# Altium PCB ICSL Receiver gede Ver2.PcbDoc
Units mm, origin at the board's own origin, x right, y up, seen from the top; angles counter-clockwise.
Board outline 152.4 x 101.6 mm, 2 copper layers (Top Layer, Bottom Layer); 19 components, 42 nets, 186 pads, 28 vias.
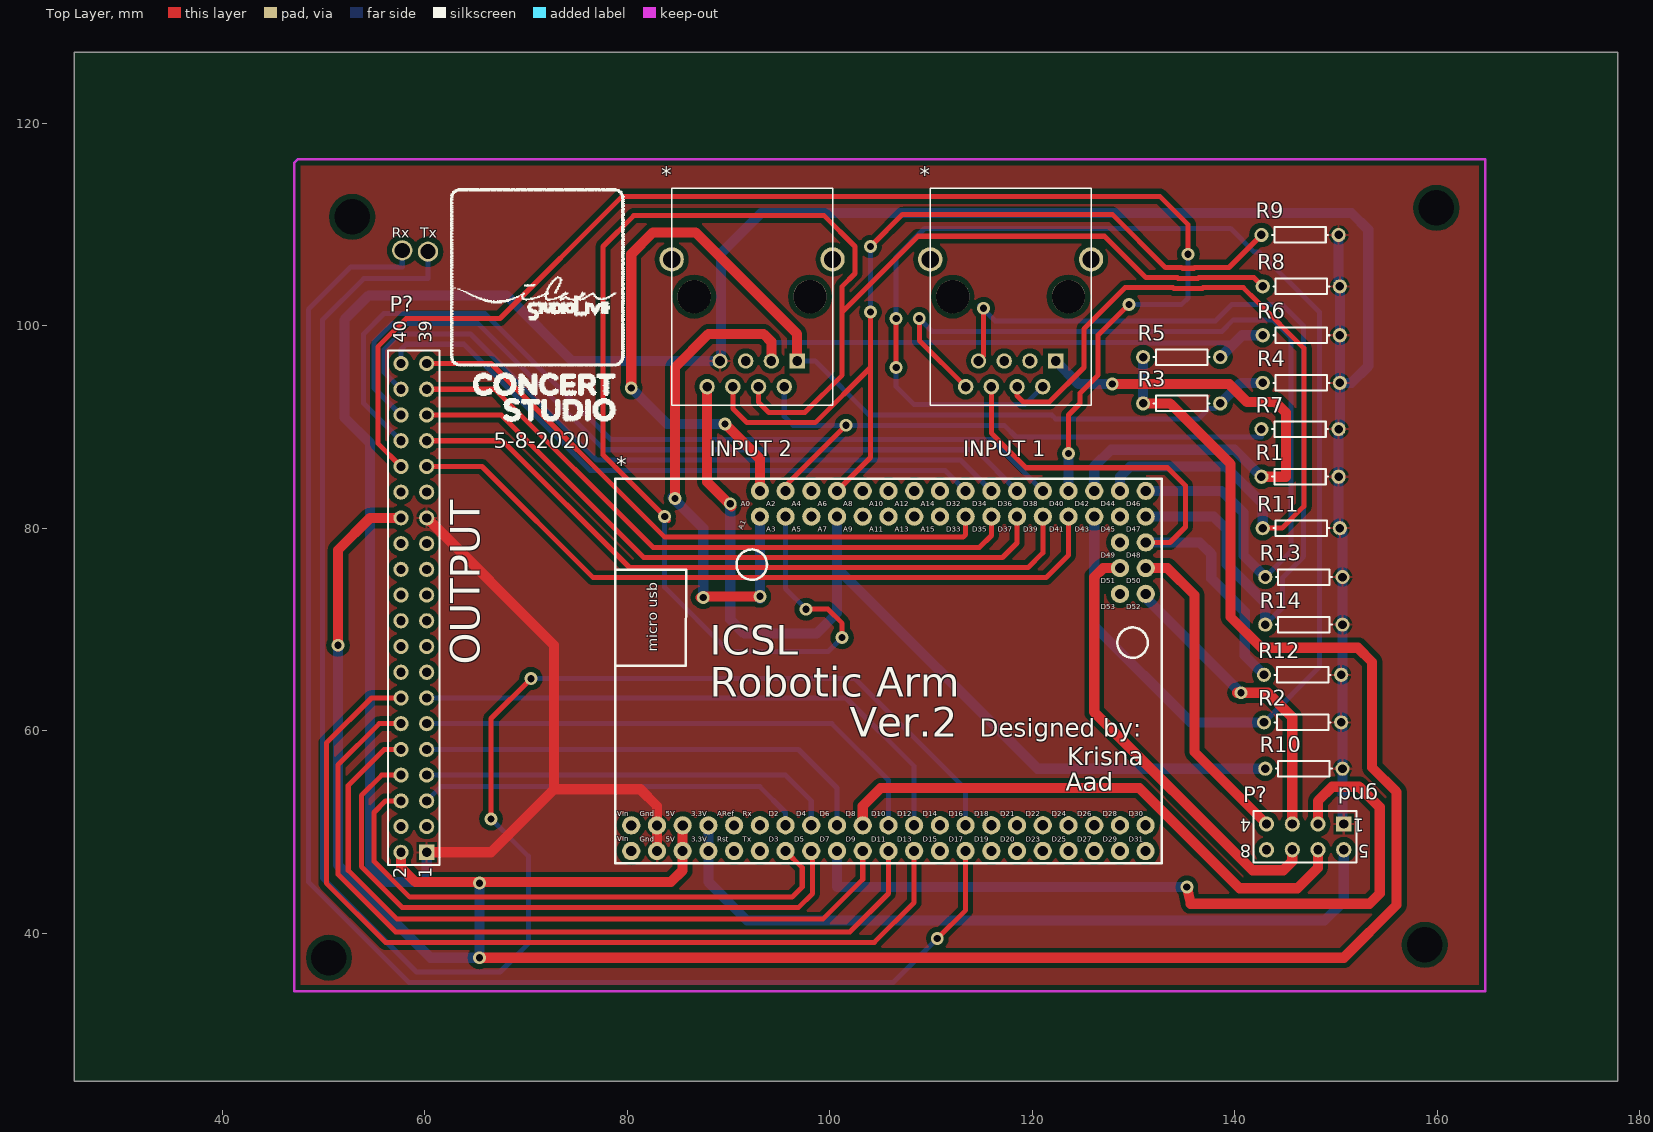
[diagram p0: Top Layer view]
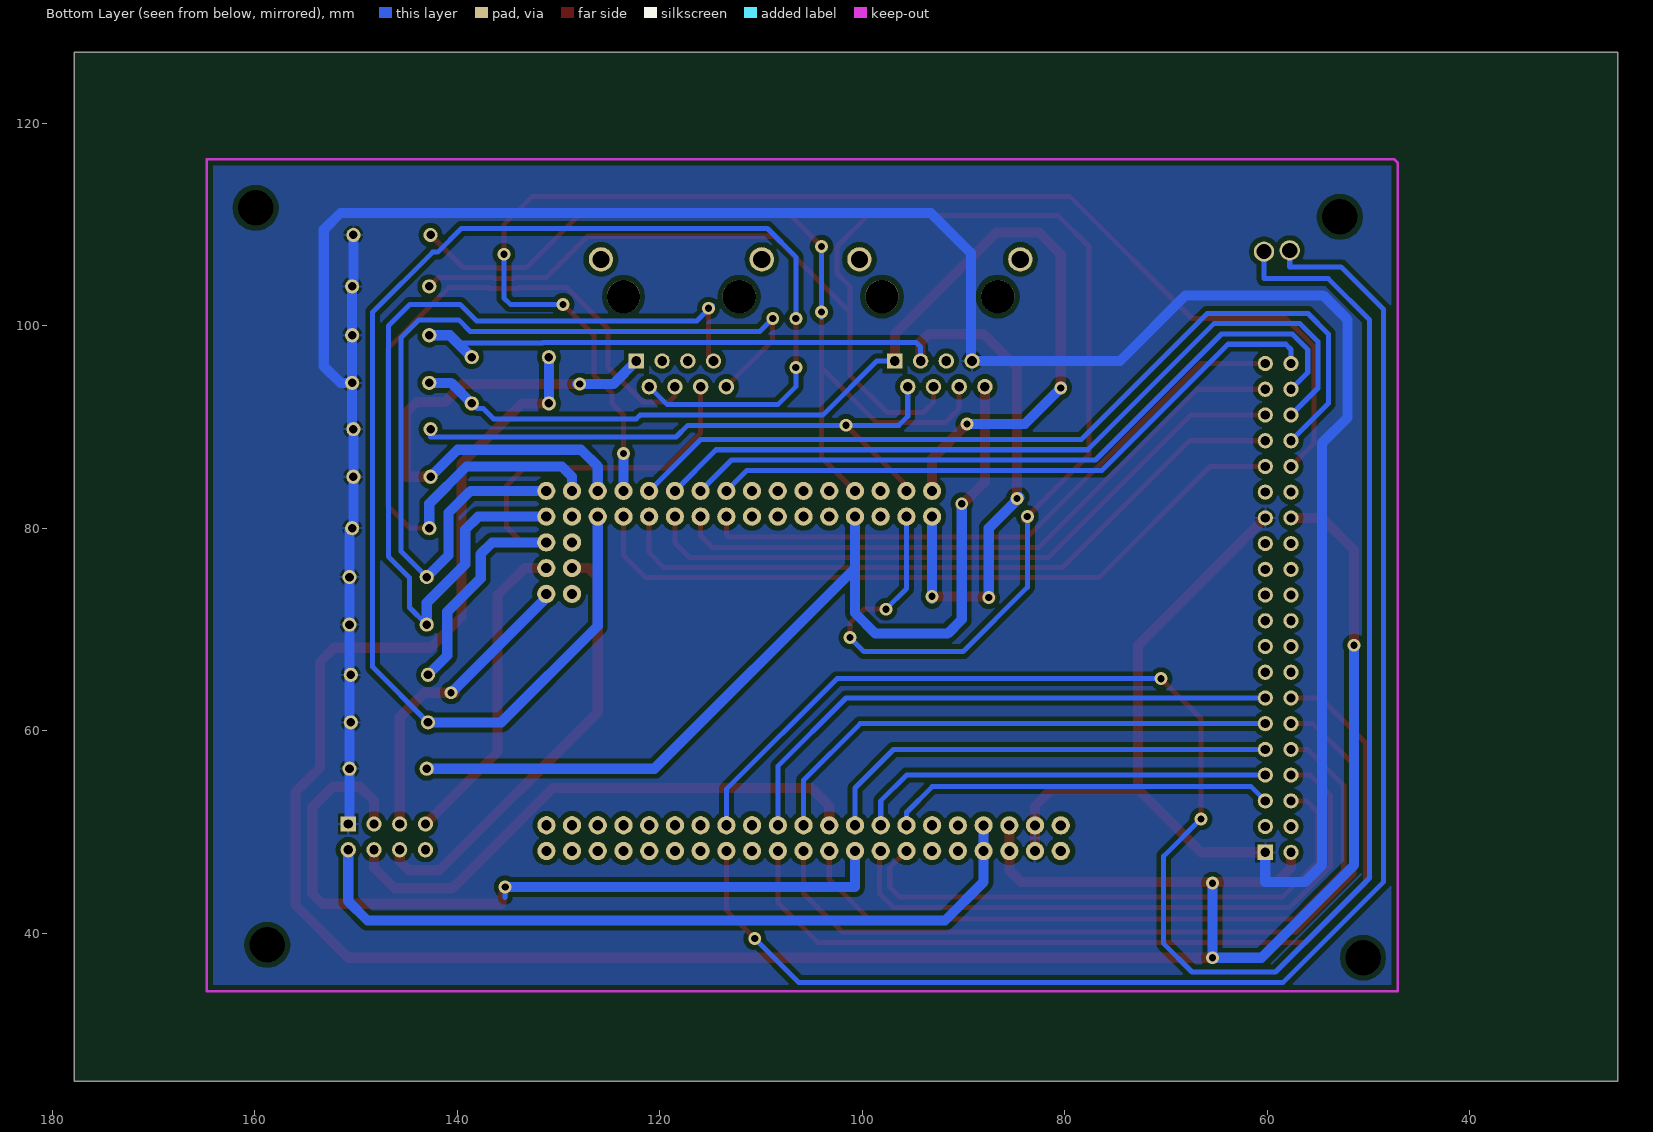
[diagram p1: Bottom Layer view, seen from below]

## Layer stack, top to bottom
Top Solder: solder mask 0.0102, Solder Resist, Dk 3.5
Top Layer: signal copper 0.0356
Dielectric 1: dielectric 0.32, FR-4, Dk 4.8
Bottom Layer: signal copper 0.0356
Bottom Solder: solder mask 0.0102, Solder Resist, Dk 3.5

## Board outline
25.4,25.4 177.8,25.4 177.8,127 25.4,127

## Design rules (kind name [scope] priority, off if disabled: settings)
Clearance [All] p1: gap=0.5
PolygonConnect [All] p1: connectstyle=Relief reliefconductorwidth=0.254 reliefentries=4 polygonreliefangle="90 Angle" airgapwidth=0.254
RoutingVias [All] p1: holewidth=0.711 width=1.27 viastyle="Through Hole" minholewidth=0.711 minwidth=1.27 maxholewidth=0.711 maxwidth=1.27
SolderMaskExpansion [All] p1: expansion=0.102
UnpouredPolygon [All] p1: allowunpoured=FALSE
Width [All] p1: maxlimit=1 minlimit=0.1 preferedwidth=0.5
29 further rules are at their usual default settings.

## Classes and differential pairs
component class "ICSL Receiver gede Ver2": * P? R1 R2 R3 R4 R5 R6 R7 R8 R9 R10 R11 R12 R13 R14

## Components (designator, comment, footprint, x,y, rotation, side; value= is the part's Value field where it differs from the comment)
* "Input2" PCBComponent_1#1 96.774,96.52 r180 top
* "Input1" PCBComponent_1#1 122.301,96.52 r180 top
* "MegaPro" PCBComponent_1#2 80.396,50.668 r0 top
P? "Header 20X2" HDR2X20 60.198,48.006 r90 top
P? "NRF24L01" HDR2X4_CEN 150.749,50.8 r180 top
R1 "Res1" AXIAL-0.3 146.431,85.09 r0 top
R2 "Res2" AXIAL-0.3 146.685,60.833 r180 top
R3 "Res1" AXIAL-0.3 134.747,92.329 r0 top
R4 "Res1" AXIAL-0.3 146.558,94.361 r0 top
R5 "Res1" AXIAL-0.3 134.747,96.901 r180 top
R6 "Res1" AXIAL-0.3 146.558,99.06 r180 top
R7 "Res1" AXIAL-0.3 146.431,89.789 r180 top
R8 "Res1" AXIAL-0.3 146.558,103.886 r180 top
R9 "Res1" AXIAL-0.3 146.431,108.966 r180 top
R10 "Res1" AXIAL-0.3 146.812,56.261 r180 top
R11 "Res1" AXIAL-0.3 146.558,80.01 r180 top
R12 "10k" AXIAL-0.3 146.685,65.532 r180 top
R13 "Res1" AXIAL-0.3 146.812,75.184 r180 top
R14 "Res1" AXIAL-0.3 146.812,70.485 r0 top

## Footprints (in the part's own frame and the unit in brackets; to place one, negate y for a bottom-side part, rotate by r counter-clockwise, add the part's x,y. Pads: shape width x height; smd on the part's side, far side on the other; paste and mask are expansions set on the pad)
AXIAL-0.3 [mm] "Axial Device, Thru-Hole; 2 Leads; 0.3 in Pin Spacing"
  round 1.4 hole 0.85: 1(-3.81,0) 2(3.81,0)
  silkscreen extent -2.77,-0.76 2.77,0.76
HDR2X4_CEN [mm] "Connector; Header; 4x2 Position"
  rect 1.5x1.5 hole 0.9: 1(0,0)
  round 1.5 hole 0.9: 2(2.54,0) 3(5.08,0) 4(7.62,0) 5(0,2.54) 6(2.54,2.54) 7(5.08,2.54) 8(7.62,2.54)
  silkscreen extent -1.27,-1.27 8.89,3.81
HDR2X20 [mm] "Connector; Header; 20x2 Position"
  rect 1.5x1.5 hole 0.9: 1(0,0)
  round 1.5 hole 0.9: 2(0,2.54) 3(2.54,0) 4(2.54,2.54) 5(5.08,0) 6(5.08,2.54) 7(7.62,0) 8(7.62,2.54) 9(10.16,0) 10(10.16,2.54) 11(12.7,0) 12(12.7,2.54) 13(15.24,0) 14(15.24,2.54) 15(17.78,0) 16(17.78,2.54) 17(20.32,0) 18(20.32,2.54) 19(22.86,0) 20(22.86,2.54) 21(25.4,0) 22(25.4,2.54) 23(27.94,0) 24(27.94,2.54) 25(30.48,0) 26(30.48,2.54) 27(33.02,0) 28(33.02,2.54) 29(35.56,0) 30(35.56,2.54) 31(38.1,0) 32(38.1,2.54) 33(40.64,0) 34(40.64,2.54) 35(43.18,0) 36(43.18,2.54) 37(45.72,0) 38(45.72,2.54) 39(48.26,0) 40(48.26,2.54)
  silkscreen extent -1.27,-1.27 49.53,3.81
PCBComponent_1#1 [mil]
  round 94.49 hole 66.93: 0(-137.6,-394.88) 0(487.6,-394.88)
  rect 60x60 hole 37.4: 1(0,0)
  round 60 hole 37.4: 2(50,100) 3(100,0) 4(150,100) 5(200,0) 6(250,100) 7(300,0) 8(350,100)
  round 129.92 hole 129.92 unplated: ""(-50,-250) ""(400,-250)
  silkscreen extent -138,-671 488,171
PCBComponent_1#2 [mil]
  round 70.87 hole 39.37: 1(0,0) 2(0,-100) 3(100,0) 4(100,-100) 5(200,0) 6(199.8,-99.8) 7(300,0) 8(299.8,-99.8) 9(400,0) 10(400,-100) 11(499.8,0.2) 12(499.8,-99.8) 13(599.8,0.2) 14(599.8,-99.8) 15(699.8,0.2) 16(699.8,-99.8) 17(799.8,0.2) 18(799.8,-99.8) 19(900,0) 20(899.8,-99.8) 21(999.8,0.2) 22(999.8,-99.8) 23(1099.8,0.2) 24(1099.8,-99.8) 25(1199.8,0.2) 26(1199.8,-99.8) 27(1299.8,0.2) 28(1299.8,-99.8) 29(1399.8,0.2) 30(1399.8,-99.8) 31(1499.8,0.2) 32(1499.8,-99.8) 33(1599.8,0.2) 34(1599.8,-99.8) 35(1699.8,0.2) 36(1699.8,-99.8) 37(1799.8,0.2) 38(1799.8,-99.8) 39(1899.8,0.2) 40(1899.8,-99.8) 41(1999.5,0.2) 42(1999.5,-99.8) 43(500,1300) 44(500,1200) 45(600,1300) 46(600,1200) 47(700,1300) 48(700,1200) 49(800,1300) 50(800,1200) 51(900,1300) 52(900,1200) 53(1000,1300) 54(1000,1200) 55(1100,1300) 56(1100,1200) 57(1200,1300) 58(1200,1200) 59(1300,1300) 60(1300,1200) 61(1400,1300) 62(1400,1200) 63(1500,1300) 64(1500,1200) 65(1600,1300) 66(1600,1200) 67(1700,1300) 68(1700,1200) 69(1800,1300) 70(1800,1200) 71(1900,1300) 72(1900,1200) 73(1999.9,1300) 74(1999.9,1200) 75(2000.1,1099.9) 76(1900,1100) 77(2000,1000) 78(1900,1000) 79(2000,900) 80(1900,900)
  silkscreen extent -63,-148 2063,1348

## Part data
* * *: library part Component_1
P?: "Header, 20-Pin, Dual row"
P?: library part "Header 4X2A", "Header, 4-Pin, Dual row"
R1 R3 R4 R5 R6 R7 R8 R9 R10 R11 R13 R14: "Resistor"
R2 R12: library part Res1, "Resistor"

## Free pads (board coordinates)
  round 1.524 hole 3.5: 0(50.546,37.592) 0(52.832,110.744) 0(158.75,38.862) 0(159.893,111.633)
  round 2 hole 1.5: 2(57.785,107.442) 3(60.325,107.315)

## Via types
v1: diameter 1.27, hole 0.711, Top Layer to Bottom Layer, 28 vias

## Nets (pads, with @x,y where several pads share a name; then routed paths per layer and width w, separated by ;. In a path a pad name is that pad's centre, name@x,y a point inside that pad or via, vN(x,y) a via of type N, cw(c..) or ccw(c..) an arc to the next point about the centre after c; other vN are vias at no path point)
3.3V: *.7@88.016,50.668 *.8@88.011,48.133 P?.5@150.749,48.26 | length 75.8
  Bottom Layer w1: *.7@88.011,50.663 88.011,48.133 88.011,45.085 91.821,41.275 148.844,41.275 150.749,43.18 P?.5@150.749,48.26
5V: *.5@85.476,50.668 *.6@85.471,48.133 P?.2@57.658,48.006 P?.28 R3.1 R5.2 | length 263.1
  Top Layer w1: v1@51.435,68.326 v1(51.435,68.453) 51.435,77.851 54.61,81.026 P?.28 ; P?.2@57.658,48.006 57.658,46.482 59.075,45.065 84.308,45.065 85.471,46.228 85.471,48.133 *.5@85.471,50.663 ; v1(65.405,37.592) 150.749,37.592 155.956,42.799 155.956,53.975 153.543,56.388 153.543,66.802 152.146,68.199 142.621,68.199 139.573,71.247 139.573,86.36 133.604,92.329 R3.1
  Bottom Layer w1: v1(51.435,68.453) 51.435,46.736 60.579,37.592 v1(65.405,37.592) v1(65.405,44.958) ; R3.1 R5.2
A0: *.1@96.774,96.52 *.43 R3.2 R4.1 | length 106.1
  Top Layer w1: v1(80.391,93.853) 80.391,107.061 82.55,109.22 86.741,109.22 96.774,99.187 *.1@96.774,96.52 ; v1(89.662,90.297) 93.096,86.863 *.43
  Bottom Layer w0.5: *.1@96.774,96.52 98.552,96.52 103.902,91.17 121.936,91.17 122.301,90.805 136.398,90.805 137.414,91.821 138.049,91.821 R3.2
  Bottom Layer w1: v1@80.264,93.98 v1(80.391,93.853) 83.947,90.297 v1(89.662,90.297) ; R3.2 140.589,94.361 R4.1
A1: *.3@94.234,96.52 *.44 R5.1 R6.2 | length 104.7
  Top Layer w1: v1(84.709,82.931) 84.709,95.885 88.011,99.187 93.472,99.187 94.234,98.425 *.3@94.234,96.52 ; v1@87.249,73.152 v1(87.503,73.152) 87.63,73.279 v1(93.096,73.279)
  Bottom Layer w0.5: *.3@94.234,96.52 94.234,97.917 94.668,98.351 131.538,98.351 131.591,98.298 139.954,98.298 140.716,99.06
  Bottom Layer w1: v1@84.455,83.058 87.503,80.01 v1(87.503,73.152) ; v1@93.096,73.03 v1(93.096,73.279) *.44 ; R5.1 140.716,99.06 R6.2
A2: *.2@95.504,93.98 *.45 R7.2 | length 60.6
  Top Layer w0.5: *.45 95.636,84.206 v1(101.6,90.17)
  Bottom Layer w0.5: *.2@95.504,93.98 95.504,91.059 96.393,90.17 v1(101.6,90.17) 117.221,90.17 118.384,89.007 129.05,89.007 129.07,89.027 142.621,89.027 R7.2
A3: *.4@92.964,93.98 *.46 R8.2 | length 172.4
  Top Layer w0.5: v1@84.074,80.772 v1(83.693,81.153) 77.597,87.249 77.597,107.823 80.645,110.871 99.441,110.871 102.489,107.823 102.489,105.156 101.219,103.886 101.219,101.346 ; *.4@92.964,93.98 92.964,92.456 93.98,91.44 97.536,91.44 101.219,95.123 101.219,101.346 ; v1(97.663,72.009) 99.822,72.009 101.219,70.612 v1(101.219,69.215) ; R8.2 141.875,104.759 136.453,104.759 136.37,104.676 134.394,104.676 134.311,104.759 131.207,104.759 127.127,108.839 108.712,108.839 101.219,101.346
  Bottom Layer w0.5: v1(83.693,81.153) 83.693,74.168 90.043,67.818 99.822,67.818 v1(101.219,69.215) v1@101.346,69.342 ; *.46 95.636,74.036 v1(97.663,72.009) v1@97.79,71.882
A6: *.6@90.424,93.98 *.49 R9.2 | length 88.4
  Top Layer w0.5: *.6@90.424,93.98 90.424,91.821 91.821,90.424 98.552,90.424 104.013,95.885 ; *.49 104.013,86.985 104.013,95.885 ; v1@103.759,107.569 v1(104.013,107.823) 107.188,110.998 127.889,110.998 133.128,105.759 134.725,105.759 134.808,105.676 135.956,105.676 136.039,105.759 139.414,105.759 R9.2 ; v1(104.013,101.346) 104.013,95.885
  Bottom Layer w0.5: v1@104.013,100.838 v1(104.013,101.346) v1(104.013,107.823)
A7: *.8@87.884,93.98 *.50 R10.2 | length 96.2
  Top Layer w1: *.8@87.884,93.98 87.884,84.582 v1@90.297,82.169
  Bottom Layer w1: v1(90.17,82.423) 90.17,70.993 91.567,69.596 98.679,69.596 100.716,71.633 *.50 ; 100.716,76.068 120.523,56.261 R10.2
D2: *.13 P?.5@60.198,53.086 | length 38.3
  Bottom Layer w0.5: P?.5@60.198,53.086 61.595,54.483 93.091,54.483 95.631,51.943 *.13
D3: *.14 P?.6@57.658,53.086 | length 56.4
  Top Layer w0.5: P?.6@57.658,53.086 56.134,53.086 54.991,51.943 54.991,47.117 58.535,43.573 96.278,43.573 97.282,44.577 97.282,46.482 *.14
D4: *.15 P?.7@60.198,55.626 | length 41.4
  Bottom Layer w0.5: P?.7@60.198,55.626 95.631,55.626 98.171,53.086 *.15
D5: *.16 P?.8@57.658,55.626 | length 62.8
  Top Layer w0.5: P?.8@57.658,55.626 55.753,55.626 53.741,53.614 53.741,46.599 57.767,42.573 96.929,42.573 98.282,43.926 98.282,48.022 *.16
D6: *.17 P?.9 | length 45.8
  Bottom Layer w0.5: P?.9 96.901,58.166 100.711,54.356 *.17
D7: *.18 P?.2@148.209,50.8 | length 78.2
  Top Layer w1: v1(135.255,44.577) 135.636,42.926 153.289,42.926 154.305,43.942 154.305,52.451 152.273,54.483 149.606,54.483 148.209,53.086 P?.2@148.209,50.8
  Bottom Layer w0.5: 135.255,43.561 v1(135.255,44.577)
  Bottom Layer w1: *.18 100.711,44.577 v1(135.255,44.577)
D8: *.19 P?.6@148.209,48.26 | length 54.3
  Top Layer w1: *.19 103.256,52.583 105.029,54.356 130.556,54.356 140.462,44.45 146.177,44.45 148.209,46.482 P?.6@148.209,48.26
D9: *.20 P?.10 | length 72.3
  Top Layer w0.5: P?.10 56.007,58.166 52.451,54.61 52.451,46.228 57.277,41.402 99.314,41.402 103.251,45.339 *.20
D10: *.21 P?.11 | length 52.4
  Bottom Layer w0.5: P?.11 100.203,60.706 105.791,55.118 *.21
D11: *.22 P?.12 | length 81.2
  Top Layer w0.5: P?.12 55.499,60.706 51.435,56.642 51.451,56.626 51.451,45.814 57.133,40.132 101.981,40.132 105.791,43.942 *.22
D12: *.23 P?.13 | length 56.8
  Bottom Layer w0.5: P?.13 101.6,63.246 108.331,56.515 *.23
D13: *.24 P?.14 | length 90.2
  Top Layer w0.5: P?.14 54.737,63.246 50.292,58.801 50.292,44.958 56.134,39.116 104.394,39.116 108.331,43.053 *.24
D32: *.59 P?.40 | length 63.4
  Bottom Layer w0.5: P?.40 57.658,97.663 58.166,98.171 63.881,98.171 76.327,85.725 111.379,85.725 *.59
D33: *.60 P?.39 | length 62.2
  Top Layer w0.5: P?.39 66.548,96.266 83.693,79.121 113.157,79.121 113.416,79.38 *.60
D34: *.61 P?.38 | length 71.6
  Bottom Layer w0.5: P?.38 56.007,95.377 56.007,97.663 57.531,99.187 64.516,99.187 76.962,86.741 112.903,86.741 *.61
D35: *.62 P?.37 | length 64.6
  Top Layer w0.5: P?.37 66.929,93.726 82.534,78.121 114.792,78.121 115.956,79.285 *.62
D36: *.63 P?.36 | length 79.4
  Bottom Layer w0.5: P?.36 54.991,93.853 54.991,98.425 56.769,100.203 65.278,100.203 77.724,87.757 114.427,87.757 *.63
D37: *.64 P?.35 | length 67.3
  Top Layer w0.5: P?.35 67.564,91.186 81.629,77.121 117.062,77.121 118.496,78.555 *.64
D38: *.65 P?.34 | length 87.2
  Bottom Layer w0.5: P?.34 53.975,92.329 53.975,99.187 55.991,101.203 65.929,101.203 78.359,88.773 115.951,88.773 *.65
D39: *.66 P?.33 | length 70.2
  Top Layer w0.5: P?.33 67.691,88.646 80.216,76.121 119.586,76.121 121.036,77.571 *.66
D40: *.67 P?.32 | length 134.9
  Top Layer w0.5: P?.32 55.372,88.392 55.372,97.917 58.166,100.711 67.437,100.711 79.502,112.776 132.588,112.776 135.382,109.982 v1(135.382,107.061) v1@135.382,106.68 ; v1(123.576,87.371) 123.576,91.191 124.714,92.329 124.714,93.345 126.492,95.123 126.492,99.06 v1(129.54,102.108)
  Bottom Layer w0.5: v1@129.286,102.108 v1(129.54,102.108) 134.747,102.108 135.382,102.743 v1(135.382,107.061)
  Bottom Layer w1: *.67 v1(123.576,87.371)
D41: *.68 P?.31 | length 72.6
  Top Layer w0.5: P?.31 65.659,86.106 76.644,75.121 121.348,75.121 123.576,77.349 *.68
D42: *.1@122.301,96.52 *.69 R1.1 | length 54.6
  Top Layer w1: v1(127.889,94.234) 139.446,94.234 141.224,92.456 144.018,92.456 145.034,91.44 145.034,85.09 R1.1
  Bottom Layer w1: *.1@122.301,96.52 124.587,94.234 v1(127.889,94.234) v1@128.143,94.234 ; *.69 126.116,86.111 127.762,87.757 139.954,87.757 R1.1
D43: *.2@121.031,93.98 *.70 R2.2 | length 150
  Top Layer w0.5: v1@106.553,95.504 v1(106.553,95.885) v1(106.553,100.711)
  Bottom Layer w0.5: v1(106.553,95.885) 106.553,93.98 108.331,92.202 119.253,92.202 *.2@121.031,93.98 ; v1@106.553,100.457 v1(106.553,100.711) 106.553,106.807 109.347,109.601 139.582,109.601 141.917,107.266 142.416,107.266 148.336,101.346 148.336,66.294 R2.2
  Bottom Layer w1: *.70 126.116,70.353 135.636,60.833 R2.2
D44: *.4@118.491,93.98 *.71 R11.2 | length 79.4
  Top Layer w0.5: *.4@118.491,93.98 118.491,93.091 119.114,92.468 121.678,92.468 125.095,95.885 125.095,99.695 129.159,103.759 133.897,103.759 133.98,103.676 136.784,103.676 136.867,103.759 140.824,103.759 142.147,102.436 142.166,102.436 146.812,97.79 146.812,82.169 144.653,80.01 R11.2
  Bottom Layer w1: *.71 128.656,85.095 129.667,86.106 139.065,86.106 142.748,82.423 R11.2
D46: *.8@113.411,93.98 *.73 R13.2 | length 89.5
  Top Layer w0.5: v1(108.839,100.711) 108.839,98.552 *.8@113.411,93.98
  Bottom Layer w0.5: v1(108.839,100.711) 110.109,99.441 138.7,99.441 139.843,100.584 143.764,100.584 145.542,98.806 145.542,77.724 R13.2
  Bottom Layer w1: *.73 138.689,83.688 140.843,81.534 140.843,77.343 R13.2
D47: *.7@114.681,96.52 *.74 R14.1 | length 90.1
  Top Layer w0.5: *.7@114.681,96.52 115.189,97.028 v1(115.189,101.727)
  Bottom Layer w0.5: v1@114.808,101.981 116.332,100.457 138.065,100.457 139.696,102.088 144.673,102.088 146.792,99.969 146.792,77.206 144.702,75.116 144.702,72.185 R14.1
  Bottom Layer w1: *.74 137.927,81.148 139.192,79.883 139.192,76.454 143.002,72.644 R14.1
D48: *.6@115.951,93.98 *.75 R12.2 | length 55.6
  Top Layer w0.5: *.6@115.951,93.98 115.951,89.408 119.38,85.979 133.35,85.979 135.128,84.201 135.128,80.137 133.596,78.605 *.75
  Bottom Layer w1: *.75 136.533,78.605 137.668,77.47 137.668,75.057 140.97,71.755 140.97,67.437 R12.2
D50: *.77 P?.4@143.129,50.8 | length 31.5
  Top Layer w1: *.77 133.355,76.068 136.017,73.406 136.017,57.912 P?.4@143.129,50.8
D51: *.78 P?.7@145.669,48.26 | length 43.8
  Top Layer w1: *.78 126.995,76.068 126.111,75.184 126.111,61.849 141.732,46.228 144.78,46.228 145.669,47.117 P?.7@145.669,48.26
D52: *.79 P?.3@145.669,50.8 | length 30.7
  Top Layer w1: v1@140.208,63.754 v1(140.589,63.754) 143.256,63.754 145.669,61.341 P?.3@145.669,50.8
  Bottom Layer w1: *.79 131.196,73.147 v1(140.589,63.754)
GND: *.3@82.936,50.668 *.4@82.936,48.128 *.7@89.154,96.52 P?.1 P?.27 R1.2 R2.1 R4.2 R6.1 R7.1 R8.1 R9.1 R10.1 R11.1 R12.1 R13.1 R14.2 | length 319.4
  Top Layer w1: P?.1@60.198,48.006 66.548,48.006 72.771,54.229 ; P?.27 72.771,68.453 72.771,54.229 ; *.4@82.936,48.128 82.936,50.668 82.936,52.573 81.28,54.229 72.771,54.229
  Bottom Layer w0.254: R11.1 R11.1@150.622,79.756
  Bottom Layer w1: P?.1@60.198,48.006 60.198,45.085 56.261,45.085 54.61,46.736 54.61,88.392 52.07,90.932 52.07,100.584 54.483,102.997 68.072,102.997 74.549,96.52 89.154,96.52 89.264,96.52 89.264,107.171 93.218,111.125 151.511,111.125 153.162,109.474 153.162,96.012 151.511,94.361 R4.2 ; R11.1@150.241,80.137 R1.2 R7.1 150.368,89.916 R4.2 ; R8.1@150.241,104.013 R9.1 ; R8.1 R6.1 R4.2 ; R11.1@150.622,79.756 R13.1 R14.2 R10.1 150.622,50.927 P?.1@150.749,50.8
RX: *.27 pad.3 | length 176.1
  Top Layer w0.5: v1(66.548,51.308) 66.548,61.214 v1(70.485,65.151)
  Bottom Layer w0.5: pad.3 60.325,104.648 53.975,104.648 49.911,100.584 49.911,45.466 59.182,36.195 67.437,36.195 70.231,38.989 70.231,47.625 v1(66.548,51.308) v1@66.294,51.562 ; v1@70.231,65.151 v1(70.485,65.151) 102.489,65.151 113.411,54.229 *.27
TX: *.28 pad.2 | length 147.2
  Top Layer w0.5: v1@110.49,39.37 v1(110.617,39.497) 113.411,42.291 *.28
  Bottom Layer w0.5: pad.2 57.785,105.791 52.705,105.791 48.514,101.6 48.514,45.085 58.432,35.167 106.287,35.167 v1(110.617,39.497)
pads on no net: *. *.0 *.1@80.396,50.668 *.2@80.396,48.128 *.3@119.761,96.52 *.5@91.694,96.52 *.5@117.221,96.52 *.9 *.10 *.11 *.12 *.25 *.26 *.29 *.30 *.31 *.32 *.33 *.34 *.35 *.36 *.37 *.38 *.39 *.40 *.41 *.42 *.47 *.48 *.51 *.52 *.53 *.54 *.55 *.56 *.57 *.58 *.72 *.76 *.80 P?.3@60.198,50.546 P?.4@57.658,50.546 P?.8@143.129,48.26 P?.15 P?.16 P?.17 P?.18 P?.19 P?.20 P?.21 P?.22 P?.23 P?.24 P?.25 P?.26 P?.29 P?.30

## Polygon pours and split planes (outlines as drawn)
GND on Top Layer "Top Layer-No Net" (solid, pour order 5): 47.117,116.078 47.117,34.29 164.719,34.29 164.719,116.459 47.498,116.459 47.117,116.078
GND on Top Layer "Top Layer-No Net" (solid, pour order 4): 47.117,116.078 47.117,34.29 164.719,34.29 164.719,116.459 47.498,116.459 47.117,116.078
GND on Bottom Layer "Top Layer-No Net" (solid, pour order 6): 47.117,116.078 47.117,34.29 164.719,34.29 164.719,116.459 47.498,116.459 47.117,116.078

## Keep-outs
Keep-Out Layer:
  lines w0.254: 47.117,34.29 164.719,34.29 164.719,116.459 47.498,116.459 47.117,116.078 47.117,34.29

## Silkscreen, mask and mechanical layers (free items; w line width, h text height)
Top Overlay:
  drawing of 1443 lines, arcs and shapes, not listed
  text "Rx" at 56.769,108.712 h1
  text "Tx" at 59.563,108.712 h1
  text "5-8-2020" at 66.802,87.884 h1.52
  text "INPUT 2" at 88.138,87.122 h1.52
  text "INPUT 1" at 113.157,87.122 h1.52
  text "OUTPUT" at 66.421,66.548 h5 r90
  text "ICSL" at 88.138,66.548 h5
  text "Robotic Arm" at 88.138,62.357 h5
  text "Designed by:" at 114.808,58.801 h3
  text "Ver.2" at 101.981,58.42 h5
  text "Krisna" at 123.444,56.007 h3
  text "gnd" at 154.178,54.356 h1.52 r180
  text "Aad" at 123.317,53.467 h3

## Dimensions
47.117,116.078 to 164.719,116.459 on Keep-Out Layer
164.719,116.459 to 164.719,34.29 on Keep-Out Layer
52.832,110.744 to 47.498,116.459 on Mechanical 1
52.832,110.744 to 47.117,116.078 on Mechanical 1
159.893,111.633 to 164.719,116.459 on Mechanical 1
159.893,111.633 to 164.719,116.459 on Mechanical 1
158.75,38.862 to 164.719,34.29 on Mechanical 1
158.75,38.862 to 164.719,34.29 on Mechanical 1
50.546,37.592 to 47.117,34.29 on Mechanical 1
50.546,37.592 to 47.117,34.29 on Mechanical 1

## Text inside footprints (layer, text, board x,y; h text height)
*: Top Overlay "VIn" at 79.012,49.077 h0.5; Top Overlay "VIn" at 79.009,51.589 h0.5; Top Overlay "Gnd" at 81.252,49.039 h0.5; Top Overlay "Gnd" at 81.252,51.586 h0.5; Top Overlay "5V" at 83.792,49.041 h0.5; Top Overlay "5V" at 83.792,51.584 h0.5; Top Overlay "3.3V" at 86.332,49.044 h0.5; Top Overlay "3.3V" at 86.332,51.581 h0.5; Top Overlay "Rst" at 88.872,49.046 h0.5; Top Overlay "ARef" at 88.872,51.589 h0.5; Top Overlay "Tx" at 91.412,49.046 h0.5; Top Overlay "Rx" at 91.412,51.589 h0.5; Top Overlay "D3" at 93.952,49.046 h0.5; Top Overlay "D2" at 93.952,51.584 h0.5; Top Overlay "D5" at 96.492,49.046 h0.5; Top Overlay "D4" at 96.71,51.589 h0.5; Top Overlay "D7" at 99.032,49.044 h0.5; Top Overlay "D6" at 99.032,51.589 h0.5; Top Overlay "D9" at 101.572,49.046 h0.5; Top Overlay "D8" at 101.572,51.586 h0.5; Top Overlay "D11" at 104.115,49.039 h0.5; Top Overlay "D10" at 104.112,51.584 h0.5; Top Overlay "D13" at 106.652,49.046 h0.5; Top Overlay "D12" at 106.652,51.586 h0.5; Top Overlay "D15" at 109.192,49.046 h0.5; Top Overlay "D14" at 109.192,51.586 h0.5; Top Overlay "D17" at 111.732,49.041 h0.5; Top Overlay "D16" at 111.732,51.584 h0.5; Top Overlay "D19" at 114.272,49.039 h0.5; Top Overlay "D18" at 114.272,51.584 h0.5; Top Overlay "D21" at 116.812,51.584 h0.5; Top Overlay "D20" at 116.812,49.046 h0.5; Top Overlay "D23" at 119.352,49.039 h0.5; Top Overlay "D22" at 119.352,51.589 h0.5; Top Overlay "D24" at 121.892,51.586 h0.5; Top Overlay "D25" at 121.892,49.034 h0.5; Top Overlay "D26" at 124.432,51.584 h0.5; Top Overlay "D27" at 124.432,49.046 h0.5; Top Overlay "D29" at 126.972,49.046 h0.5; Top Overlay "D28" at 126.972,51.584 h0.5; Top Overlay "D30" at 129.512,51.589 h0.5; Top Overlay "D31" at 129.512,49.041 h0.5; Top Overlay "A0" at 91.191,82.181 h0.5; Top Overlay "A3" at 93.726,79.646 h0.5; Top Overlay "A5" at 96.266,79.641 h0.5; Top Overlay "A7" at 98.806,79.646 h0.5; Top Overlay "A9" at 101.351,79.641 h0.5; Top Overlay "A10" at 103.886,82.186 h0.5; Top Overlay "A11" at 103.886,79.646 h0.5; Top Overlay "A13" at 106.426,79.646 h0.5; Top Overlay "A15" at 108.966,79.641 h0.5; Top Overlay "D33" at 111.506,79.646 h0.5; Top Overlay "D38" at 119.126,82.186 h0.5; Top Overlay "D39" at 119.126,79.641 h0.5; Top Overlay "D43" at 124.206,79.646 h0.5; Top Overlay "D41" at 121.666,79.641 h0.5; Top Overlay "A2" at 93.726,82.181 h0.5; Top Overlay "A4" at 96.266,82.181 h0.5; Top Overlay "A6" at 98.806,82.186 h0.5; Top Overlay "A8" at 101.346,82.181 h0.5; Top Overlay "A12" at 106.426,82.186 h0.5; Top Overlay "A14" at 108.966,82.186 h0.5; Top Overlay "D32" at 111.506,82.186 h0.5; Top Overlay "D40" at 121.666,82.186 h0.5; Top Overlay "D42" at 124.206,82.186 h0.5; Top Overlay "D36" at 116.586,82.186 h0.5; Top Overlay "D37" at 116.586,79.646 h0.5; Top Overlay "D34" at 114.046,82.186 h0.5; Top Overlay "D35" at 114.046,79.646 h0.5; Top Overlay "D44" at 126.746,82.186 h0.5; Top Overlay "D45" at 126.746,79.646 h0.5; Top Overlay "D46" at 129.286,82.181 h0.5; Top Overlay "D47" at 129.286,79.641 h0.5; Top Overlay "A1" at 91.424,79.801 h0.5 r69; Top Overlay "D49" at 126.746,77.106 h0.5; Top Overlay "D48" at 129.286,77.106 h0.5; Top Overlay "D51" at 126.746,74.566 h0.5; Top Overlay "D50" at 129.286,74.566 h0.5; Top Overlay "D52" at 129.286,72.026 h0.5; Top Overlay "D53" at 126.746,72.026 h0.5; Top Overlay "micro usb" at 82.941,67.821 h1 r90
P?: Top Overlay "39" at 60.706,98.298 h1.27 r90; Top Overlay "40" at 58.166,98.298 h1.27 r90; Top Overlay "2" at 58.166,45.466 h1.27 r90; Top Overlay "1" at 60.706,45.466 h1.27 r90
P?: Top Overlay "8" at 141.605,48.768 h1.27 r180; Top Overlay "4" at 141.605,51.308 h1.27 r180; Top Overlay "1" at 152.781,51.308 h1.27 r180; Top Overlay "5" at 153.289,48.768 h1.27 r180